# Altium PCB NODE_Module.PcbDoc (part 1 of 3)
Units mil, origin at the board's own origin, x right, y up, seen from the top; angles counter-clockwise.
Board outline 4300 x 3800 mil, 4 copper layers (Top Layer, Int1 (GND), Int2 (GND), Bottom Layer), stack 43.712 mil thick; 95 components, 106 nets, 420 pads, 98 vias.
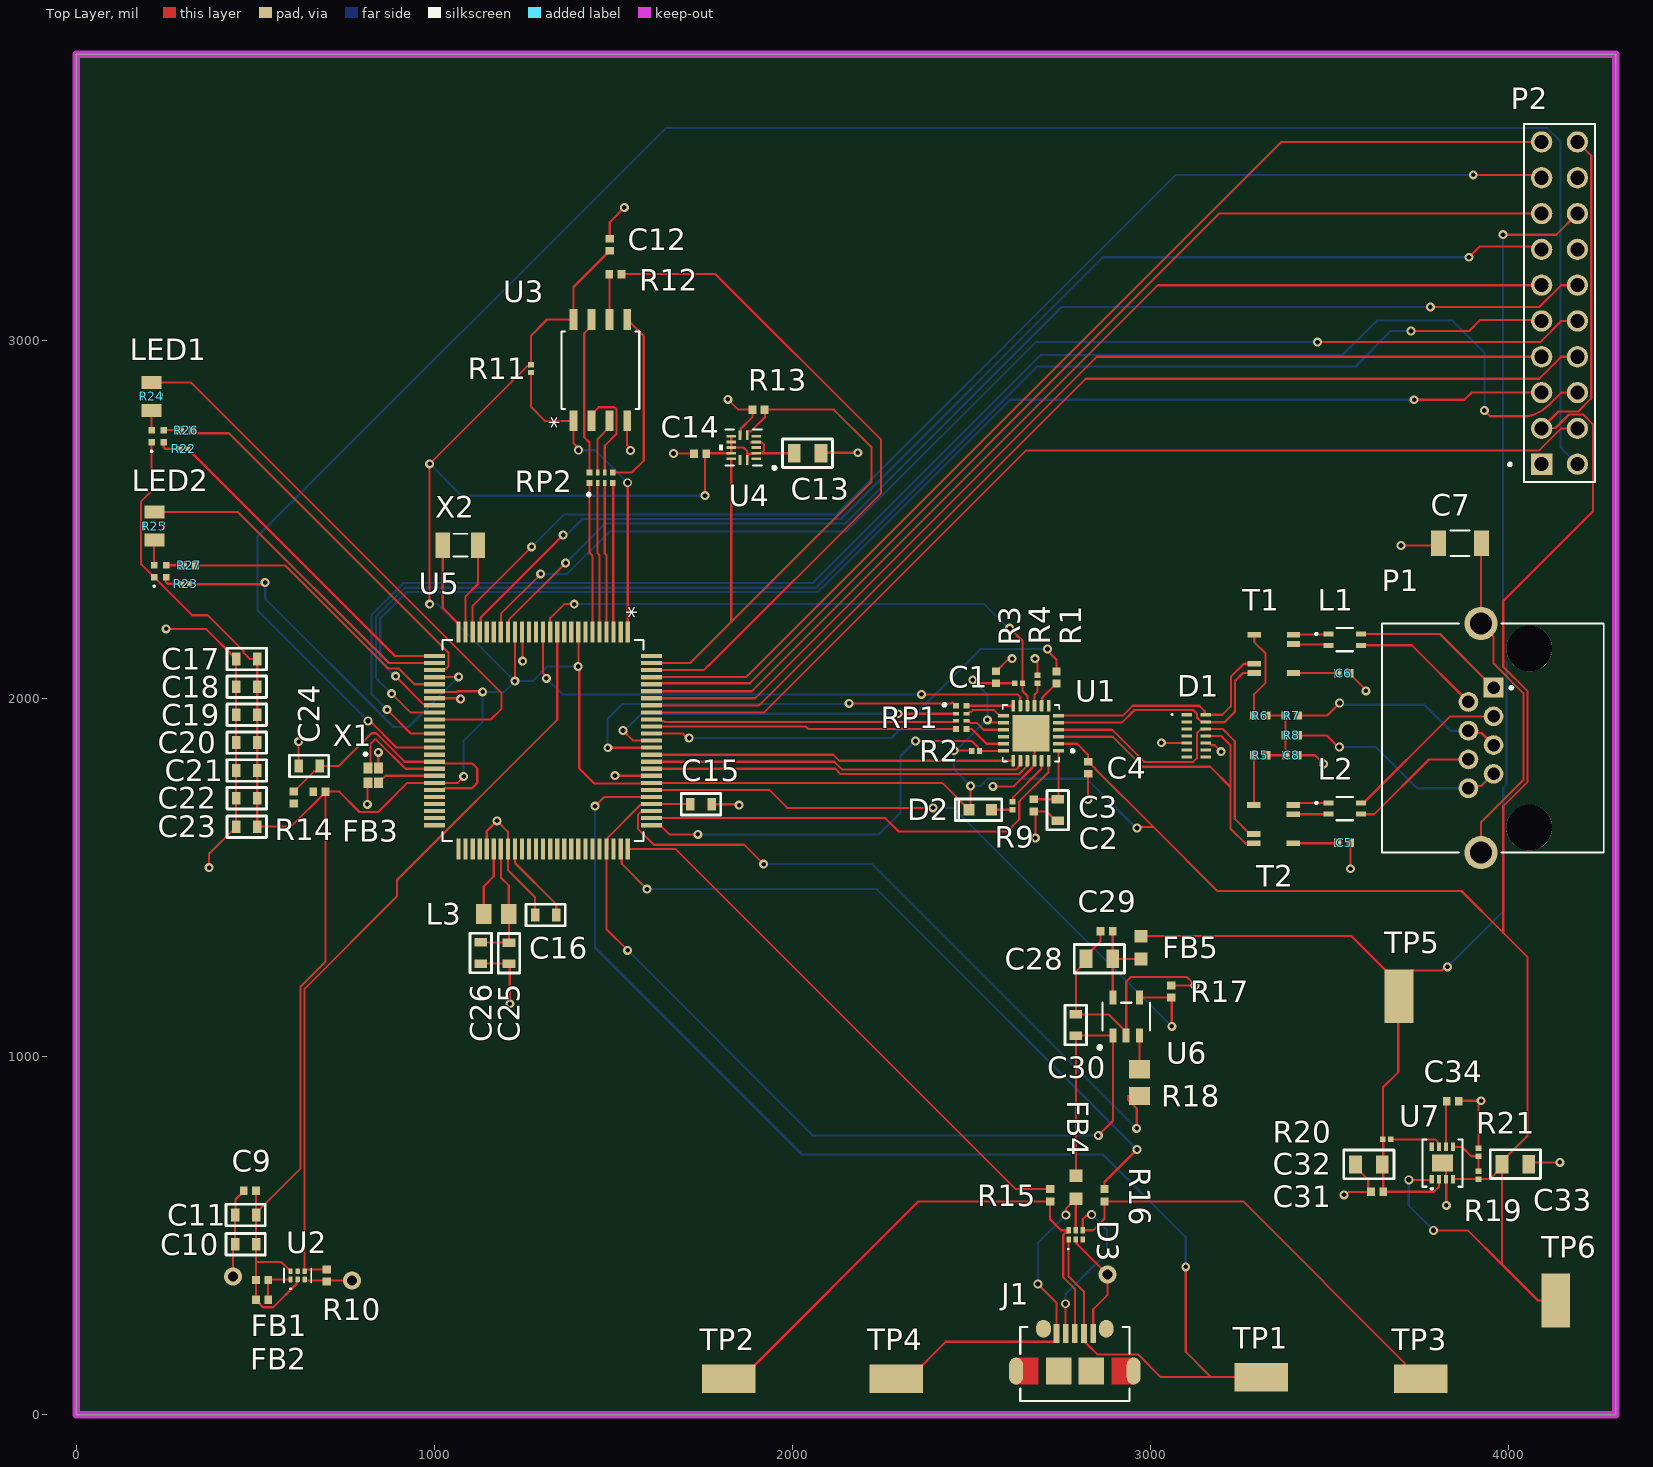
[diagram p0: Top Layer view]
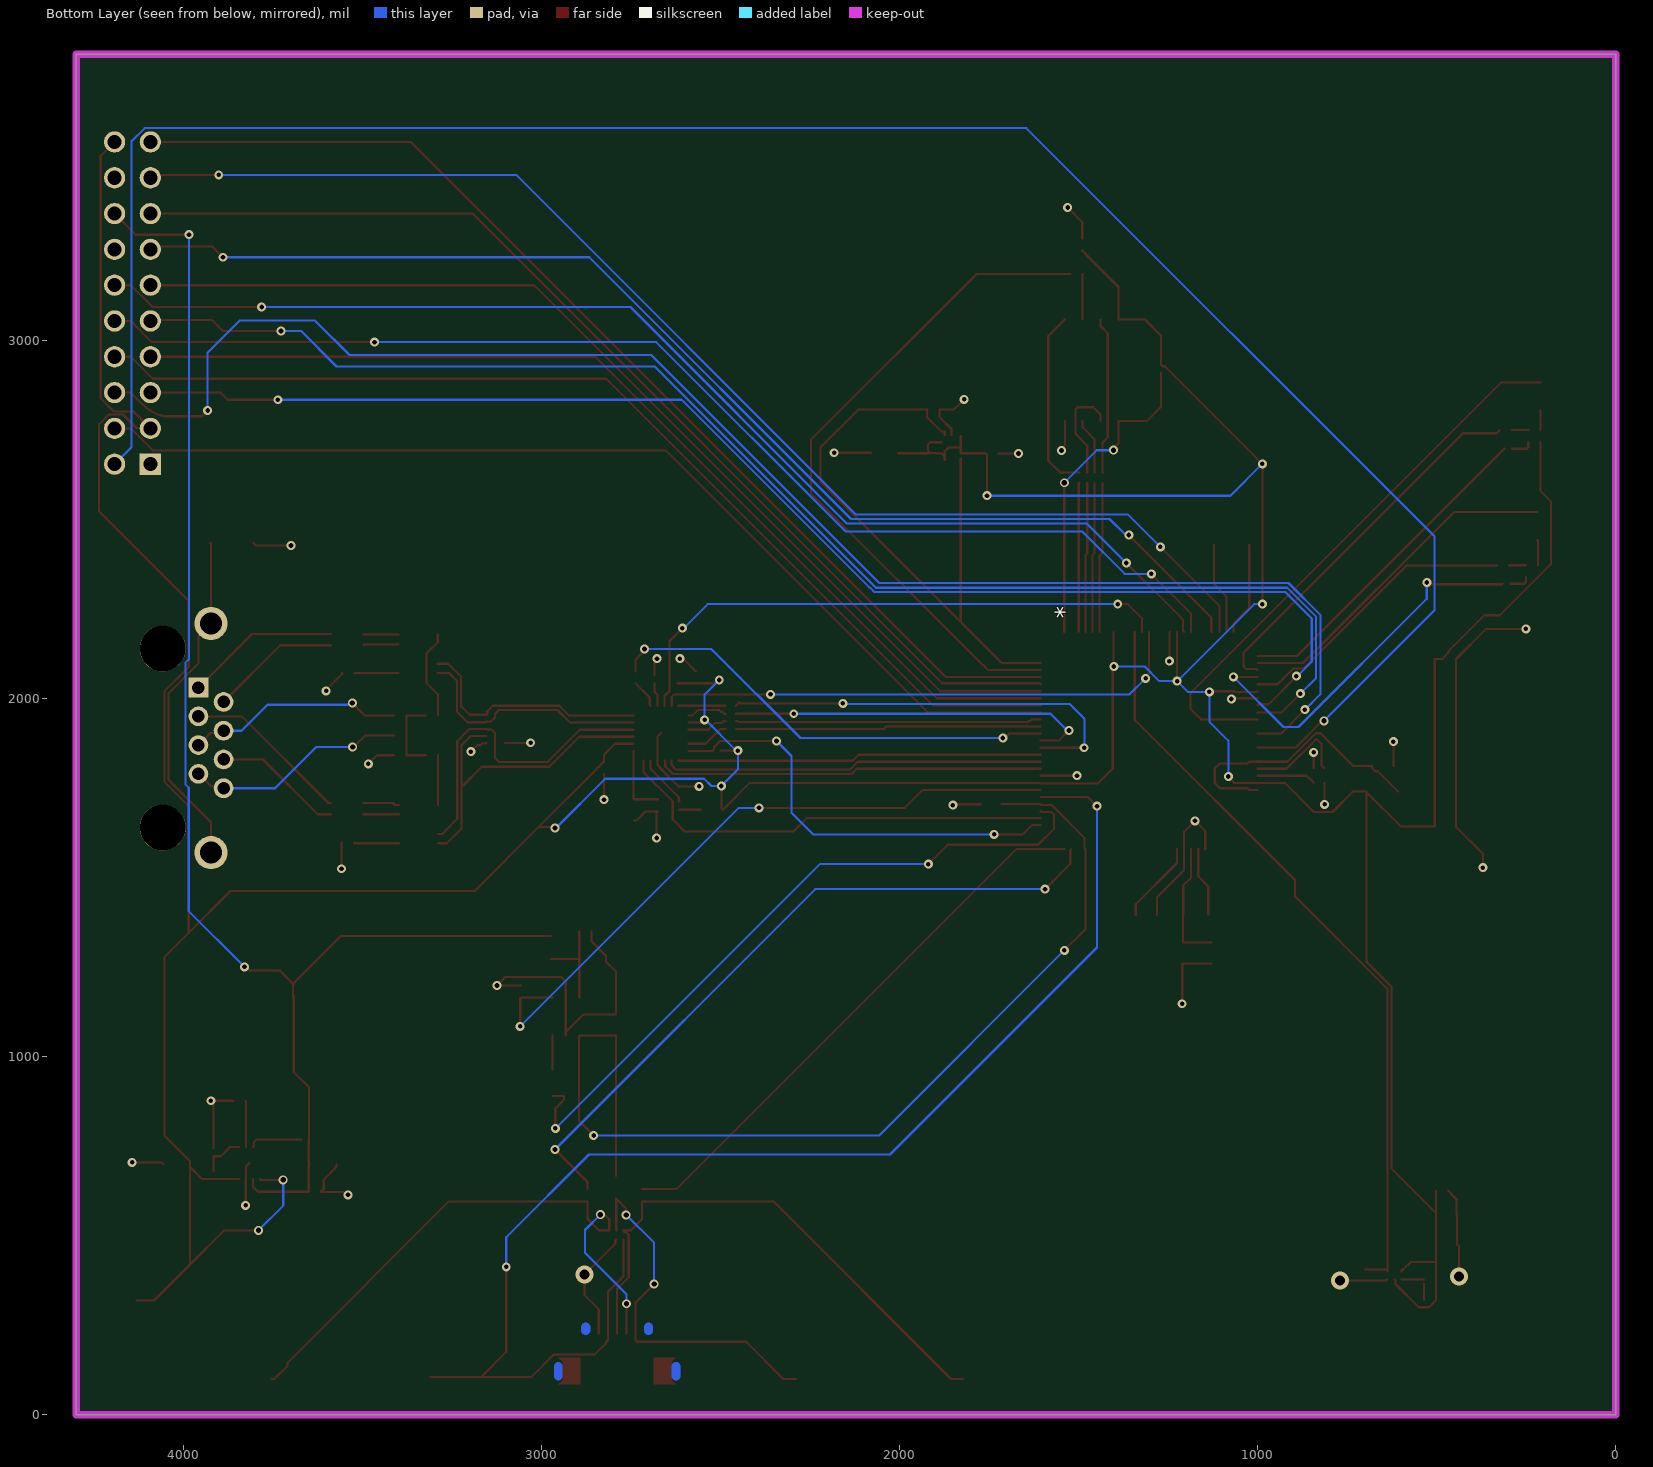
[diagram p1: Bottom Layer view, seen from below]
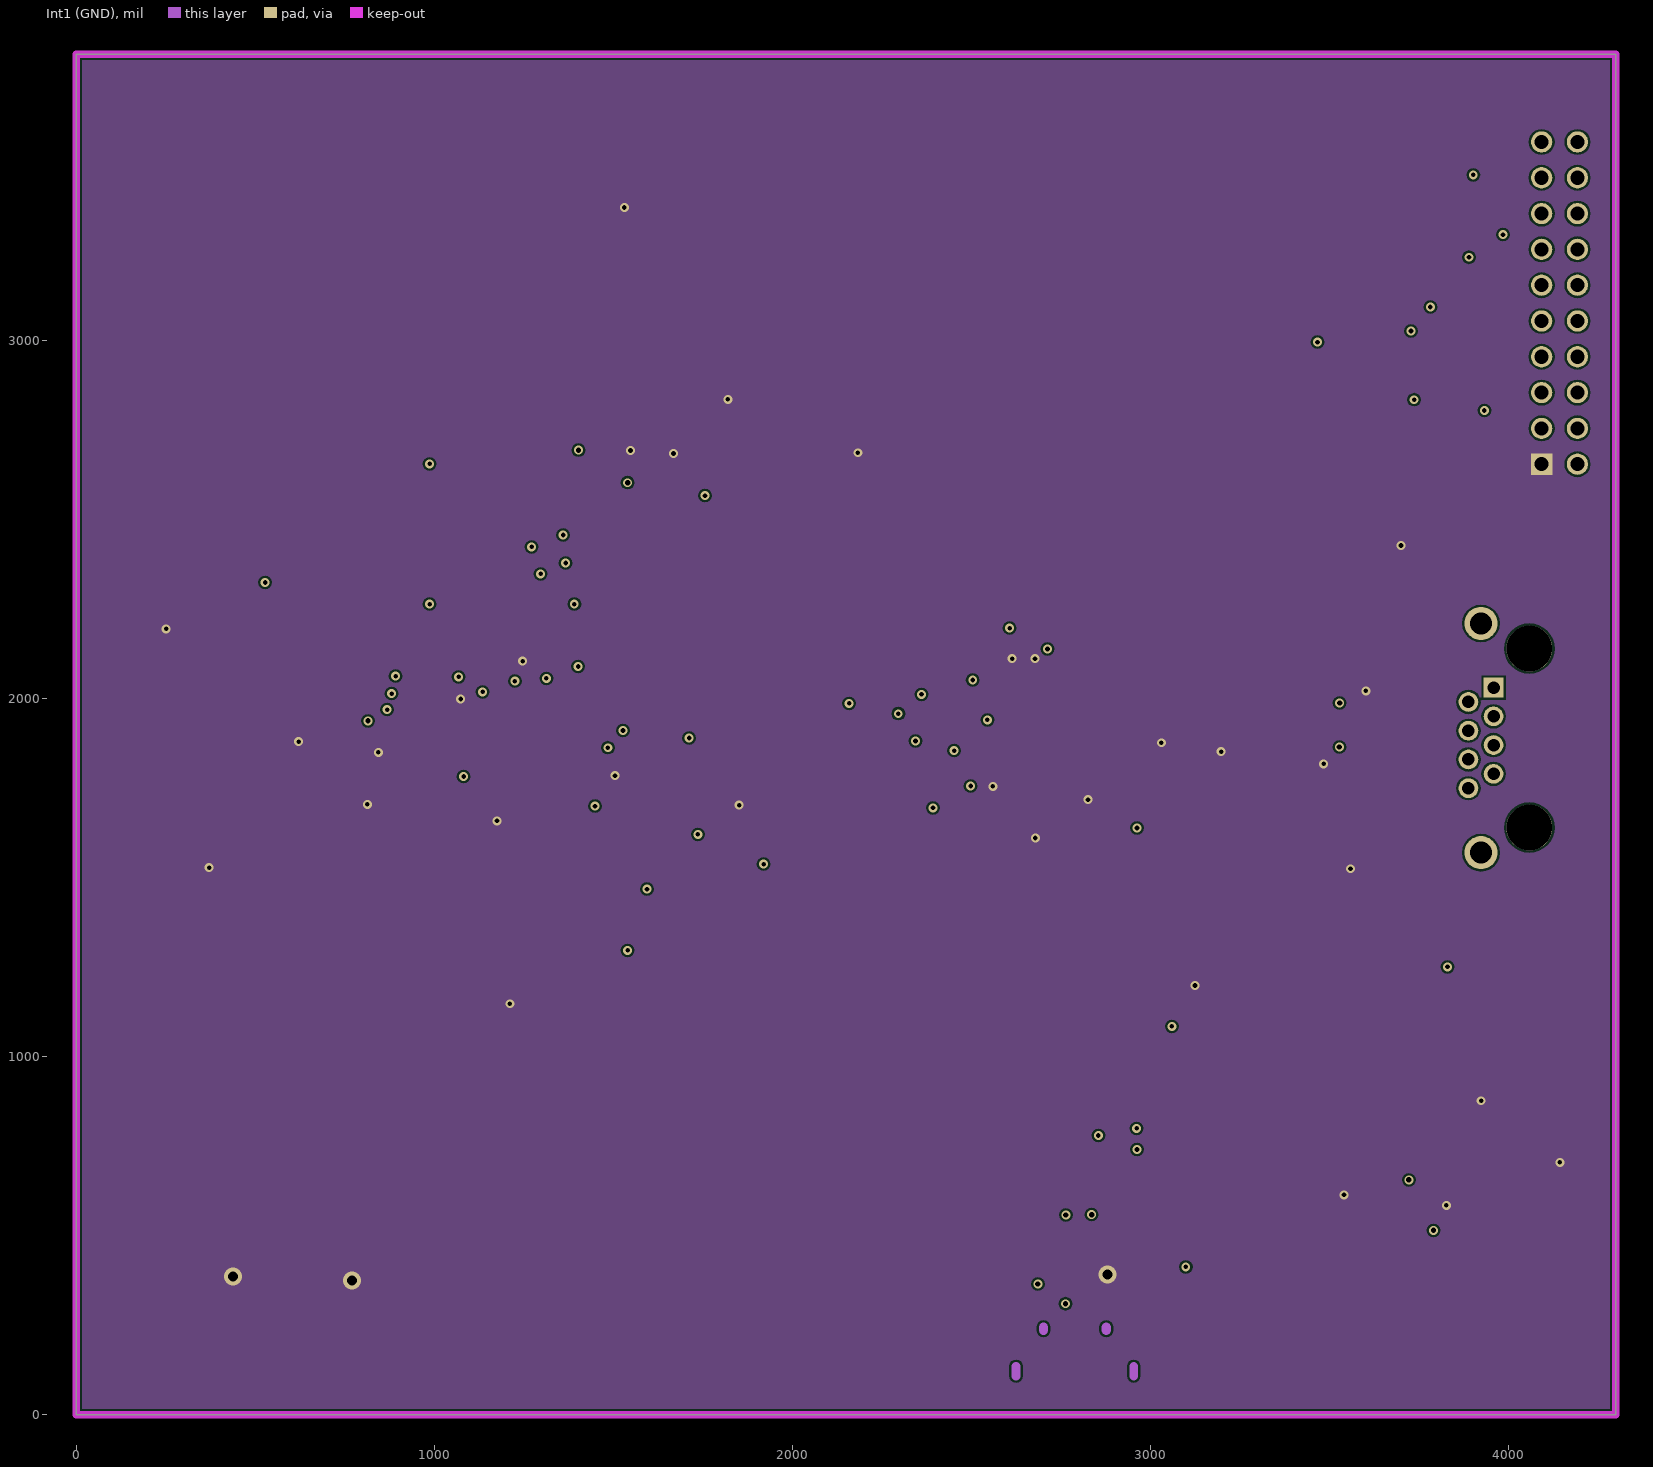
[diagram p2: Int1 (GND)]
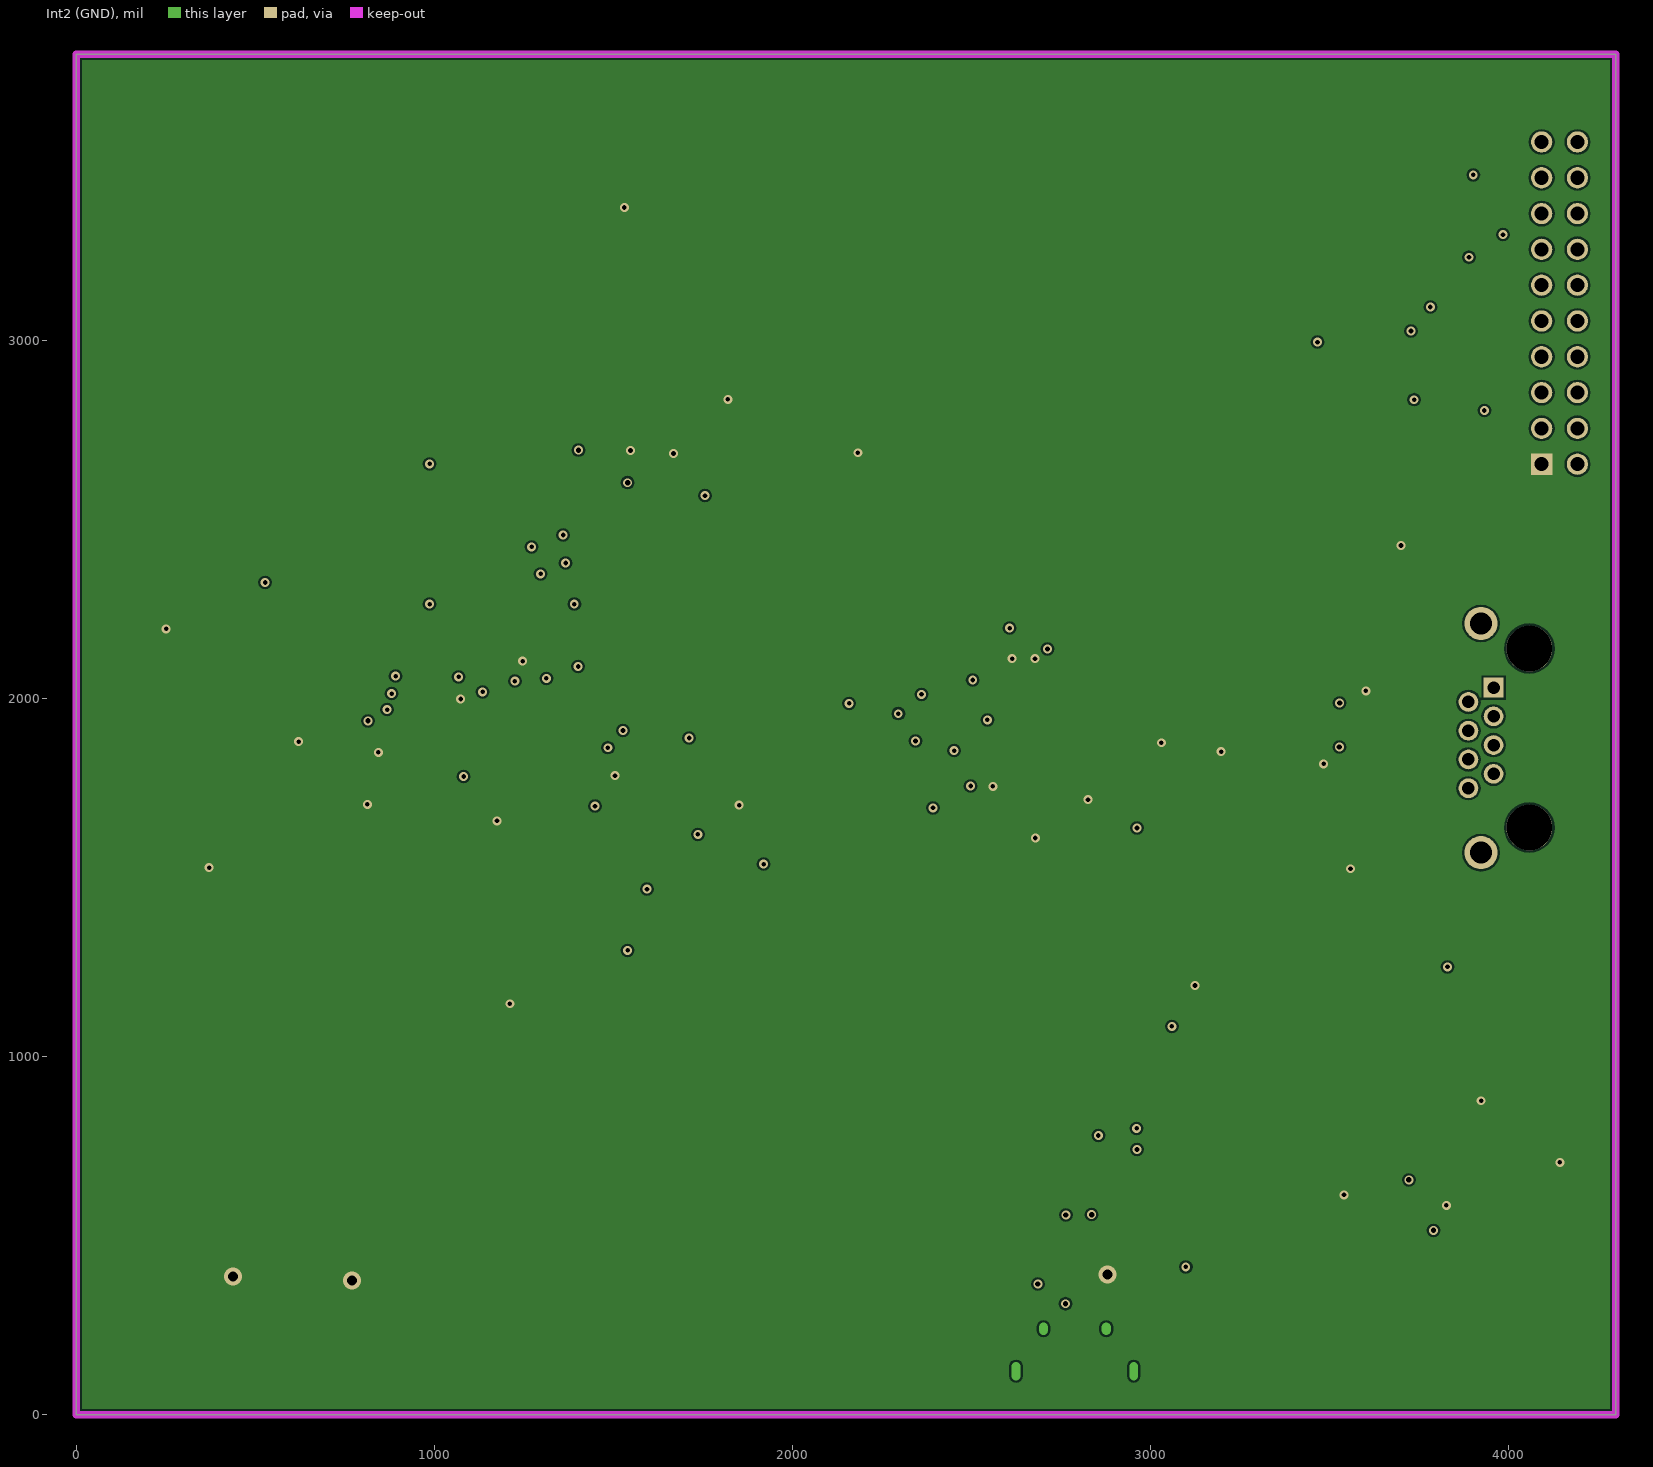
[diagram p3: Int2 (GND)]
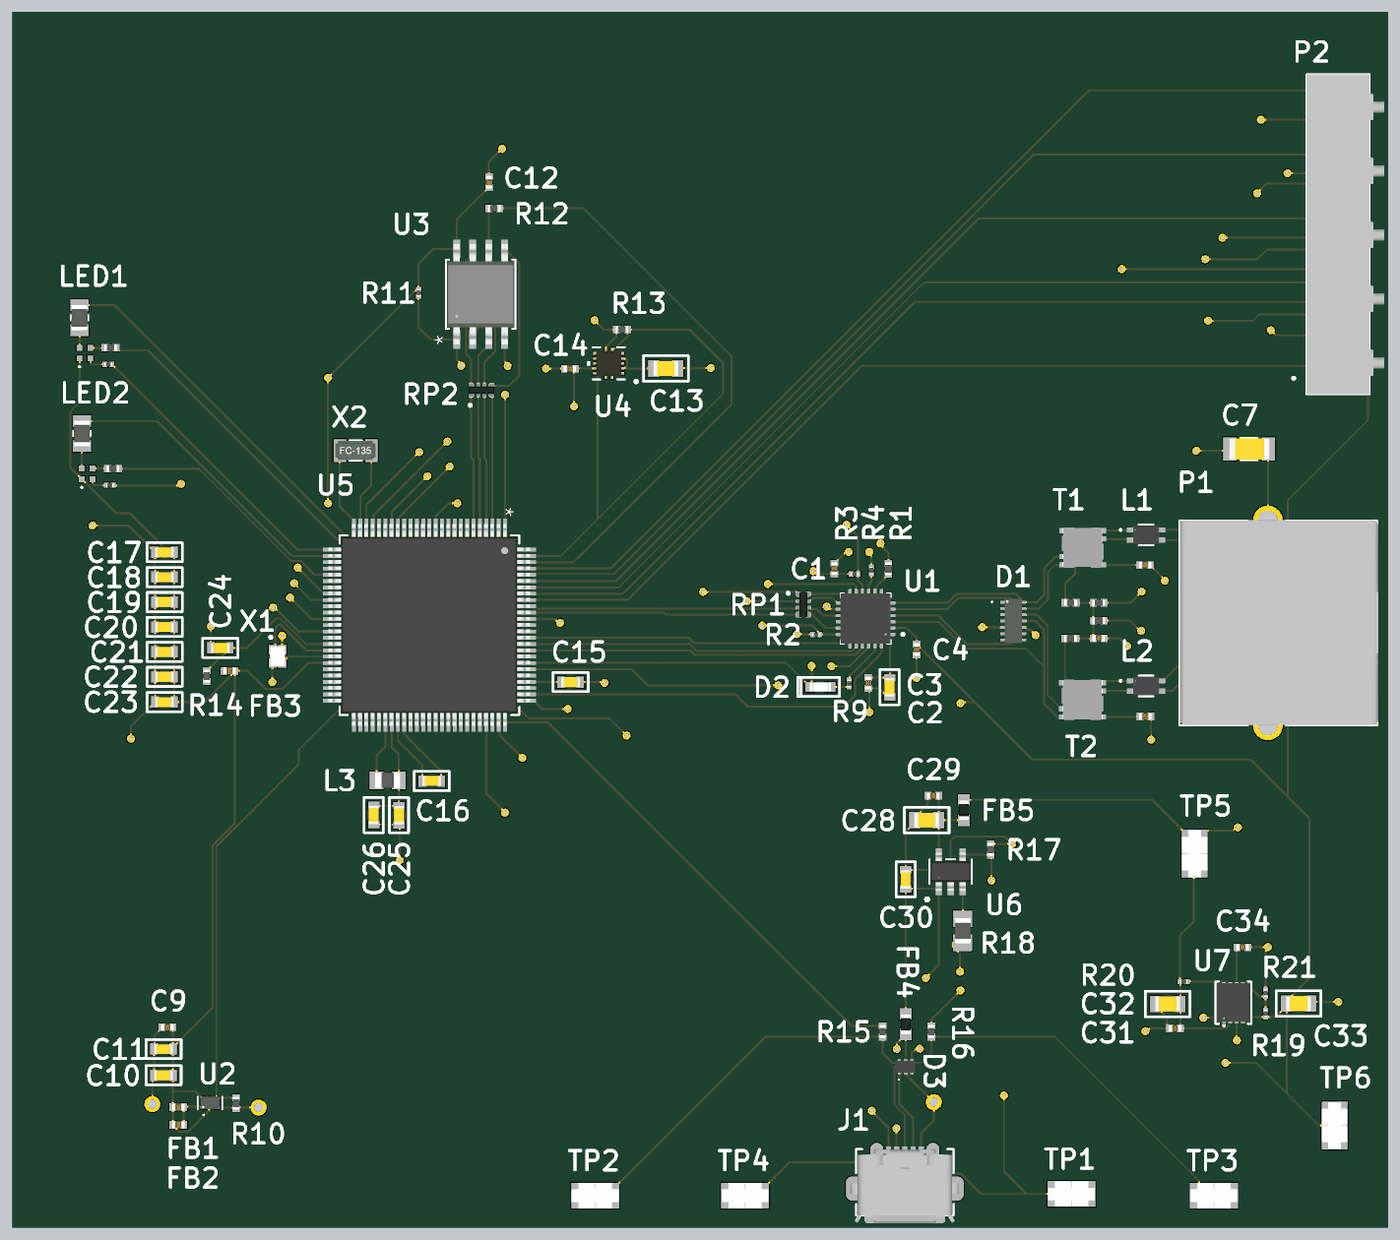
[diagram p5: 3D render of the assembled board from above, using the file's embedded part models]

## Layer stack, top to bottom
Top Solder: solder mask 1, SM-001, Dk 4
Top Layer: signal copper 1.378
Dielectric 2: prepreg 5.1, PP-017, Dk 4.3
Int1 (GND): signal copper 1.378
Dielectric 3: core 28, Core-039, Dk 4.8
Int2 (GND): signal copper 1.378
Dielectric 4: prepreg 5.1, PP-017, Dk 4.3
Bottom Layer: signal copper 1.378
Bottom Solder: solder mask 1, SM-001, Dk 4

## Board outline
0,0 4300,0 4300,3800 0,3800

## Design rules (kind name [scope] priority, off if disabled: settings)
Clearance [All] p1: gap=6 ignorepadtopadclearanceinfootprint=TRUE
HoleSize [All] p1: absolutevalues=TRUE maxlimit=100 minlimit=13 maxpercent=80.000 minpercent=20.000
HoleToHoleClearance [All] p1: gap=6 allowstackedmicrovias=TRUE
MinimumSolderMaskSliver [All] p1: minsoldermaskwidth=6
PlaneClearance [All] p1: clearance=10
PlaneConnect [All] p1: planeconnectstyle=Direct reliefexpansion=20 reliefentries=4 reliefconductorwidth=10 reliefairgap=10
PolygonConnect [All] p1: connectstyle=Direct reliefconductorwidth=10 reliefentries=4 polygonreliefangle="90 Angle" airgapwidth=10
RoutingVias [All] p1: holewidth=13 width=25 viastyle="Through Hole" minholewidth=13 minwidth=25 maxholewidth=60 maxwidth=80
SilkToSilkClearance [All] p1: silktosilkclearance=6
SilkToSolderMaskClearance [IsPad] p1: minsilkscreentomaskgap=6 clearancetoexposedcopper=TRUE
SolderMaskExpansion [All] p1: expansion=4 istentingtop=FALSE
UnRoutedNet [All] p1: checkbadconnections=TRUE
Width "Schematic Width Constraint_1" [InNet('3V3')] p1: maxlimit=100 minlimit=6 preferedwidth=20 midlayer1_minwidth=10 midlayer1_maxwidth=10 midlayer1_prefwidth=10 midlayer2_minwidth=10 midlayer2_maxwidth=10 midlayer2_prefwidth=10 minimp=50.000000 maximp=50.000000 favimp=50.000000
Width [All] p2: maxlimit=100 minlimit=6 preferedwidth=10 toplayer_prefwidth=6 midlayer1_minwidth=10 midlayer1_maxwidth=10 midlayer2_minwidth=10 midlayer2_maxwidth=10 bottomlayer_prefwidth=6 minimp=50.000000 maximp=50.000000 favimp=50.000000
22 further rules are at their usual default settings.

## Classes and differential pairs
component class U_USB: C28 C29 C30 D3 FB4 FB5 J1 R15 R16 R17 R18 TP1 TP2 TP3 TP4 U6
component class U_Quad_SPI_Memory: C12 egp R11 R12 RP2 U3
component class U_Power: C31 C32 C33 C34 R19 R20 R21 TP5 TP6 U7
component class U_LED: LED1 LED2 R22 R23 R24 R25 R26 R27
component class U_External_Memory_Power_Switch: C13 C14 R13 U4
component class U_EXP_Headers: P2
component class U_Ethernet_Switch: C9 C10 C11 FB1 FB2 R10 U2
component class U_Ethernet_PHY: C1 C2 C3 C4 R1 R2 R3 R4 RP1 U1
component class U_Ethernet_Jack: C5 C6 C7 C8 D1 D2 L1 L2 P1 R5 R6 R7 R8 R9 T1 T2
component class U_EFM32_2: C15 C16 C17 C18 C19 C20 C21 C22 C23 C24 C25 C26 FB3 L3 R14 U5 X1 X2

## Components (designator, comment, footprint, x,y, rotation, side; value= is the part's Value field where it differs from the comment)
C1 "0.1uF" C0402 2569,2060 r270 top
C2 "2.2uF" C0603 2741.58,1689 r90 top
C3 "0.1uF" C0402 2675,1702 r90 top
C4 "0.1uF" C0402 2826,1807 r90 top
C5 "0.1uF" C0402 3541.01,1598 r180 top
C6 "0.1uF" C0402 3540,2071 r180 top
C7 "1nF 2KV" RESC1206X70N 3865,2434 r0 top
C8 "1nF" C0402 3395,1842 r180 top
C9 "0.1uF" C0402 484.99,625.99 r0 top
C10 "22uF" C0603 473,476 r0 top
C11 "22uF" C0603 473,558 r0 top
C12 "0.1uF" C0402 1490,3267.99 r270 top
C13 "10 µF, 16 V" C0805 2042.53,2685.38 r180 top
C14 "0.1uF" C0402 1742.53,2684.38 r0 top
C15 "22uF" C0603 1745,1705 r180 top
C16 "4.7uF" C0603 1311,1396 r0 top
C17 "22uF" C0603 476.2,2111.06 r0 top
C18 "22uF" C0603 476.2,2033.17 r0 top
C19 "22uF" C0603 476.2,1955.29 r180 top
C20 "22uF" C0603 476.2,1877.4 r180 top
C21 "22uF" C0603 476.2,1799.52 r180 top
C22 "22uF" C0603 476.2,1721.64 r180 top
C23 "22uF" C0603 476.2,1642.64 r180 top
C24 "4.7uF" C0603 650.47,1812 r0 top
C25 "22uF" C0603 1208.69,1289.11 r270 top
C26 "22uF" C0603 1129.81,1289.64 r270 top
C28 "10 µF, 16 V" C0805 2857.6,1273.42 r180 top
C29 "0.1uF" C0402 2878,1350 r0 top
C30 "1uF" C0603 2792,1088.53 r270 top
C31 "0.1uF" C0402 3633.47,622.48 r0 top
C32 "10 µF, 16 V" C0805 3610.47,699.07 r0 top
C33 "10 µF, 16 V" C0805 4019.47,700 r180 top
C34 "33nF" C0402 3844.47,876 r180 top
D1 "TPD6E05U06RVZR" SON50P135X350X55-14N 3128,1896 r0 top
D2 "Green" LED_0603 2525.07,1690 r0 top
D3 "IP4221CZ6-XS132" SOT886_NEX-M 2791.61,502.39 r90 top
FB1 "1K" FB0402 519,376.29 r0 top
FB2 "1K" FB0402 519,321 r0 top
FB3 "1K" FB0402 679.03,1740.29 r0 top
FB4 "1K 100MHz" FB0603 2792.39,635.44 r90 top
FB5 "1K 100MHz" FB0603 2974,1305 r270 top
J1 "Micro USB AB" "MOLEX MICRO USB" 2789.28,181.06 r0 top
L1 "ACM2012" IND_TDK_ACM2012_2P_TDK-M 3543,2165 r0 top
L2 "ACM2012" IND_TDK_ACM2012_2P_TDK-M 3543,1693 r0 top
L3 "4.7uH" L0805 1173,1398 r0 top
LED1 "SMLP34RGB2W3" ROHM-SMLP34-4_V 227.27,2733.27 r180 top
LED2 "SMLP34RGB2W3" ROHM-SMLP34-4_V 234.27,2356.11 r180 top
P1 "RJ-45" TE_1-406541-5 3973.61,1890.08 r90 top
P2 "2x10 Header" "2X10 HEADER" 4143,3105 r90 top
R1 "49.9R" "R0402 VISHAY" 2738,2059.13 r270 top
R2 "1K" "R0603 VISHAY" 2511.98,1854 r0 top
R3 "1K" "R0603 VISHAY" 2632.02,2043 r180 top
R4 "6.49K" "R0603 VISHAY" 2685,2054 r270 top
R5 "75R" "R0402 VISHAY" 3306.87,1842 r180 top
R6 "75R" "R0402 VISHAY" 3307.13,1953 r180 top
R7 "75R" "R0402 VISHAY" 3395.13,1953 r0 top
R8 "75R" "R0402 VISHAY" 3395.13,1897.29 r0 top
R9 "1K" "R0603 VISHAY" 2615,1701.02 r270 top
R10 "10M" "R0402 VISHAY" 700,389 r90 top
R11 "330K" "R0603 VISHAY" 1270,2922 r90 top
R12 "22R" "R0402 VISHAY" 1506,3186 r0 top
R13 "10M" "R0402 VISHAY" 1905.53,2807.38 r0 top
R14 "1R" "R0402 VISHAY" 608,1724 r270 top
R15 "15R" "R0402 VISHAY" 2720,613 r90 top
R16 "15R" "R0402 VISHAY" 2872,613 r90 top
R17 "10M" "R0402 VISHAY" 3058,1182 r90 top
R18 "0R" "R0805 YAGEO" 2970,927.6 r270 top
R19 "180K" "R0603 VISHAY" 3916.47,669.02 r270 top
R20 "10K" "R0603 VISHAY" 3660.45,769 r0 top
R21 "110K" "R0603 VISHAY" 3916.47,733 r270 top
R22 "698R" "R0603 VISHAY" 300.29,2698.27 r180 top
R23 "698R" "R0603 VISHAY" 305.27,2321.11 r180 top
R24 "2.32K" "R0805 VISHAY" 210.27,2844.27 r270 top
R25 "2.32K" "R0805 VISHAY" 218.27,2482.11 r270 top
R26 "910R" "R0402 VISHAY" 307.27,2750.27 r180 top
R27 "910R" "R0402 VISHAY" 315.27,2372.11 r180 top
RP1 "49.9R" RESCAXS50P200X100X55-8N 2472,1948 r0 top
RP2 "22RP" RESCAXS50P200X100X55-8N 1466.16,2617.17 r90 top
T1 "ALT3232M-151-T001" ALT3232M-151-T001 3345.06,2126.03 r0 top
T2 "ALT3232M-151-T001" ALT3232M-151-T001 3344.06,1650.32 r0 top
TP1 "5019" TP380X203 3310,105 r180 top
TP2 "5019" TP380X203 1822,100 r180 top
TP3 "5019" TP380X203 3755,100 r0 top
TP4 "5019" TP380X203 2290,100 r0 top
TP5 "5019" TP380X203 3694.47,1169 r90 top
TP6 "5019" TP380X203 4132,319 r90 top
U1 "KSZ8091RNDCA-TR" QFN50P400X400X90-25N 2666.7,1903.49 r180 top
U2 "NX3L1G66" PSON50P145X100X50-6N 618.28,389.42 r90 top
U3 "SST26VF064B-104I/SM" SST26VF064B-104V/SM 1464,2917.5 r90 top
U4 "TS3A4751RUCR" TS3A4751RUCR 1864.16,2701.5 r180 top
U5 "EFM32GG11B420F2048GQ100-B" TQFP100-14X14-0p 1304,1883 r270 top
U6 "AP2151WG-7" AP2151FMG-7 2932.69,1112.4 r90 top
U7 "LP3982ILD-ADJ/NOPB Voltage Regulator" LP3982ILD-ADJ 3816,703 r90 top
X1 "50.0 MHz" XTAL_ECS-500-8-47B-CWY-TR 829.24,1785.67 r270 top
X2 "32.768 KHz" XTAL_FC-135_32.7680KA-A0 1073,2429 r0 top

## Footprints (in the part's own frame and the unit in brackets; to place one, negate y for a bottom-side part, rotate by r counter-clockwise, add the part's x,y. Pads: shape width x height; smd on the part's side, far side on the other; paste and mask are expansions set on the pad)
"2X10 HEADER" [mm] "HE2P-20G6C394-5R (2.54 mm pegs)"
  rect 1.508x1.508 hole 1: 1(-11.43,1.27)
  round 1.508 hole 1: 2(-8.89,1.27) 3(-6.35,1.27) 4(-3.81,1.27) 5(-1.27,1.27) 6(1.27,1.27) 7(3.81,1.27) 8(6.35,1.27) 9(8.89,1.27) 10(11.43,1.27) 11(-11.43,-1.27) 12(-8.89,-1.27) 13(-6.35,-1.27) 14(-3.81,-1.27) 15(-1.27,-1.27) 16(1.27,-1.27) 17(3.81,-1.27) 18(6.35,-1.27) 19(8.89,-1.27) 20(11.43,-1.27)
  silkscreen extent -12.7,-2.52 12.7,3.62, body extent -12.7,-3.65 12.7,2.5, height 9.51
ALT3232M-151-T001 [mil]
  rect 37x16 smd paste+0 mask+0: 1(-54.94,-54.13) 2(-54.94,-28.54) 3(-54.94,52.56) 4(54.94,52.56) 5(54.94,26.97) 6(54.94,-54.13)
  body extent -65,-63 65,63, height 111
AP2151FMG-7 [mm]
  rect 1.006x0.5 smd paste+0 mask+0: 1(-1.353,0.95) 2(-1.353,0) 3(-1.353,-0.95) 4(1.353,-0.95) 5(1.353,0.95)
  silkscreen extent -2.31,-1.68 0.98,1.99, body extent -1.5,-1.55 1.5,1.55, height 1.45
C0402 [mm]
  rect 0.54x0.6 smd mask+0.051: 1(-0.432,0) 2(0.432,0)
  body extent -0.5,-0.25 0.5,0.25, height 0.55
C0603 [mm]
  rect 0.6x0.9 smd: 1(-0.75,0) 2(0.75,0)
  silkscreen extent -1.4,-0.76 1.4,0.76, body extent -0.75,-0.4 0.75,0.4, height 0.66
C0805 [mm]
  rect 0.9x1.3 smd: 1(-0.95,0) 2(0.95,0)
  silkscreen extent -1.78,-1.02 1.78,1.02, body extent -1,-0.6 1,0.6, height 0.95
FB0402 [mm]
  rect 0.54x0.6 smd: 1(-0.432,0) 2(0.432,0)
  body extent -0.5,-0.28 0.5,0.27, height 0.51
FB0603 [mm]
  rect 0.89x0.93 smd: 1(-0.814,0) 2(0.814,0)
  body extent -0.8,-0.4 0.8,0.4, height 0.51
IND_TDK_ACM2012_2P_TDK-M [mil]
  rect 28x14 smd paste+1 mask+0: 1(-45.5,15.75) 2(-45.5,-15.75) 3(45.5,-15.75) 4(45.5,15.75)
  silkscreen extent -82,-32 23,32, body extent -43,-27 44,27, height 51
L0805 [mm]
  rect 1.1x1.42 smd: 1(-0.885,0) 2(0.885,0)
  body extent -1,-0.63 1,0.63, height 1
LED_0603 [mm]
  rect 0.8x0.8 smd: 1(-0.8,0) 2(0.8,0)
  silkscreen extent -1.78,-0.76 1.52,0.76, body extent -0.85,-0.4 0.85,0.4, height 0.67
LP3982ILD-ADJ [mil] "300 mA voltage regulator"
  rect 24x12 smd paste-6: 1(-45,29.53) 2(-45,9.84) 3(-45,-9.84) 4(-45,-29.53) 5(45,-29.53) 6(45,-9.84) 7(45,9.84) 8(45,29.53)
  rect 47.24x59.06 smd paste-29.03 mask+0: 9(0,0)
  silkscreen extent -74,-56 66,56, body extent -63,-51 63,51, height 24
"MOLEX MICRO USB" [mil]
  rect 16x53 smd paste+0 mask+0: 1(-51.18,46.18) 2(-25.59,46.18) 3(0,46.18) 4(25.59,46.18) 5(51.18,46.18)
  oval 41x49 smd: 6(-87.6,59.06) 7(87.6,59.06)
  oval 39x75 smd: 8(-164.37,-59.06) 9(164.37,-59.06)
  rect 71x75 smd: 10(-45.28,-59.06) 11(45.28,-59.06)
  Top Layer region: 164.37,-21.56 102.37,-21.56 102.37,-96.56 164.37,-96.56 152.37,-84.56 152.37,-33.56
  Top Layer region: -102.37,-96.56 -102.37,-21.56 -164.37,-21.56 -152.37,-33.56 -152.37,-84.56 -164.37,-96.56
  Multi-Layer lines w24: -164.37,-72.83 -164.37,-45.28 ; 164.37,-72.83 164.37,-45.28
  Multi-Layer lines w26: -87.6,55.12 -87.6,62.99 ; 87.6,55.12 87.6,62.99
  silkscreen extent -152,-143 153,64, body extent -171,-167 170,65, height 108
PSON50P145X100X50-6N [mm]
  rrect50% 0.42x0.31 smd: 1(-0.29,0.5) 2(-0.29,0) 3(-0.29,-0.5) 4(0.29,-0.5) 5(0.29,0) 6(0.29,0.5)
  silkscreen extent -1,-0.97 0.5,0.97, body extent -0.5,-0.73 0.5,0.72, height 0.5
QFN50P400X400X90-25N [mm]
  rrect25% 0.81x0.26 smd mask+0.025: 1(-1.95,1.25) 2(-1.95,0.75) 3(-1.95,0.25) 4(-1.95,-0.25) 5(-1.95,-0.75) 6(-1.95,-1.25) 13(1.95,-1.25) 14(1.95,-0.75) 15(1.95,-0.25) 16(1.95,0.25) 17(1.95,0.75) 18(1.95,1.25)
  rrect25% 0.26x0.81 smd mask+0.025: 7(-1.25,-1.95) 8(-0.75,-1.95) 9(-0.25,-1.95) 10(0.25,-1.95) 11(0.75,-1.95) 12(1.25,-1.95) 19(1.25,1.95) 20(0.75,1.95) 21(0.25,1.95) 22(-0.25,1.95) 23(-0.75,1.95) 24(-1.25,1.95)
  rect 2.6x2.6 smd mask+0.025: 25(0,0)
  silkscreen extent -3.06,-2 2,2, body extent -1.99,-1.99 1.99,1.99, height 0.89
"R0402 VISHAY" [mm]
  rect 0.56x0.6 smd mask+0.051: 1(-0.435,0) 2(0.435,0)
  body extent -0.5,-0.25 0.5,0.25, height 0.35
"R0603 VISHAY" [mm]
  rect 0.38x0.4 smd: 1(-0.28,0) 2(0.28,0)
  body extent -0.3,-0.15 0.3,0.15, height 0.29
"R0805 VISHAY" [mm]
  rect 0.92x1.42 smd: 1(-1,0) 2(1,0)
  silkscreen extent -0.22,-0.7 0.22,0.7, body extent -1,-0.63 1,0.63, height 0.5
"R0805 YAGEO" [mm]
  rect 1.3x1.5 smd: 1(-0.95,0) 2(0.95,0)
  body extent -1,-0.62 1,0.63, height 0.61
RESC1206X70N [mm]
  rect 1.06x1.82 smd: 1(-1.528,0) 2(1.528,0)
  silkscreen extent -0.68,-0.9 0.68,0.9, body extent -1.57,-0.84 1.63,0.84, height 1.51
RESCAXS50P200X100X55-8N [mm]
  rect 0.435x0.41 smd mask+0.025: 1(-0.377,0.825) 4(-0.377,-0.825) 5(0.377,-0.825) 8(0.377,0.825)
  rect 0.435x0.26 smd mask+0.025: 2(-0.377,0.25) 3(-0.377,-0.25) 6(0.377,-0.25) 7(0.377,0.25)
  silkscreen extent -1.29,0.79 -1.09,0.99, body extent -0.49,-1 0.51,1, height 0.37
ROHM-SMLP34-4_V [mm] "SMD, 4-Leads, Body 1x1mm, Pitch 0.85mm"
  rect 0.45x0.45 smd: 1(0.425,0.425) 2(0.425,-0.425) 3(-0.425,-0.425) 4(-0.425,0.425)
  silkscreen extent 0.36,1.01 0.49,1.14, body extent -0.5,-0.5 0.5,0.5, height 0.25
SON50P135X350X55-14N [mm]
  rrect6% 0.74x0.22 smd paste+0 mask+0.025: 1(-0.67,1.5)
  rrect6% 0.74x0.22 smd mask+0.025: 2(-0.67,1) 3(-0.67,0.5) 4(-0.67,0) 5(-0.67,-0.5) 6(-0.67,-1) 7(-0.67,-1.5) 8(0.67,-1.5) 9(0.67,-1) 10(0.67,-0.5) 11(0.67,0) 12(0.67,0.5) 13(0.67,1) 14(0.67,1.5)
  silkscreen extent -1.75,1.47 -1.65,1.57, body extent -0.67,-1.75 0.68,1.75, height 0.56
SOT886_NEX-M [mil]
  rect 18x12 smd paste+0 mask+1: 1(-13,19.71) 2(-13,0.01) 4(13,-19.68) 5(13,0) 6(13,19.68)
  rect 18x12 smd mask+1: 3(-13,-19.68)
  silkscreen extent -40,20 -39,22, body extent -23,-29 23,29, height 10
SST26VF064B-104V/SM [mil]
  rect 58x22 smd paste+0 mask+0: 1(-141.5,75) 2(-141.5,25) 3(-141.5,-25) 4(-141.5,-75) 5(141.5,-75) 6(141.5,-25) 7(141.5,25) 8(141.5,75)
  silkscreen extent -108,-108 108,108, body extent -156,-103 157,104, height 80
TE_1-406541-5 [mm]
  rect 1.398x1.398 hole 0.89: 1(3.58,0.38)
  round 1.398 hole 0.89: 2(2.56,2.16) 3(1.54,0.38) 4(0.52,2.16) 5(-0.5,0.38) 6(-1.52,2.16) 7(-2.54,0.38) 8(-3.56,2.16)
  round 2.355 hole 1.57: S1(8.13,1.27) S2(-8.13,1.27)
  round 3.25 hole 3.25 unplated: ""(-6.35,-2.16) ""(6.35,-2.16)
  silkscreen extent -8.13,-7.44 8.13,8.3, body extent -8.1,-7.49 8.17,8.25, height 13.48
TP380X203 [mm]
  rect 3.8x2.03 smd: 1(0,0)
  body extent -1.9,-1.01 1.91,1.02, height 2.3
TQFP100-14X14-0p [mm]
  rect 1.5x0.3 smd paste+0 mask+0: 1(-7.7,6) 2(-7.7,5.5) 3(-7.7,5) 4(-7.7,4.5) 5(-7.7,4) 6(-7.7,3.5) 7(-7.7,3) 8(-7.7,2.5) 9(-7.7,2) 10(-7.7,1.5) 11(-7.7,1) 12(-7.7,0.5) 13(-7.7,0) 14(-7.7,-0.5) 15(-7.7,-1) 16(-7.7,-1.5) 17(-7.7,-2) 18(-7.7,-2.5) 19(-7.7,-3) 20(-7.7,-3.5) 21(-7.7,-4) 22(-7.7,-4.5) 23(-7.7,-5) 24(-7.7,-5.5) 25(-7.7,-6) 51(7.7,-6) 52(7.7,-5.5) 53(7.7,-5) 54(7.7,-4.5) 55(7.7,-4) 56(7.7,-3.5) 57(7.7,-3) 58(7.7,-2.5) 59(7.7,-2) 60(7.7,-1.5) 61(7.7,-1) 62(7.7,-0.5) 63(7.7,0) 64(7.7,0.5) 65(7.7,1) 66(7.7,1.5) 67(7.7,2) 68(7.7,2.5) 69(7.7,3) 70(7.7,3.5) 71(7.7,4) 72(7.7,4.5) 73(7.7,5) 74(7.7,5.5) 75(7.7,6)
  rect 0.3x1.5 smd paste+0 mask+0: 26(-6,-7.7) 27(-5.5,-7.7) 28(-5,-7.7) 29(-4.5,-7.7) 30(-4,-7.7) 31(-3.5,-7.7) 32(-3,-7.7) 33(-2.5,-7.7) 34(-2,-7.7) 35(-1.5,-7.7) 36(-1,-7.7) 37(-0.5,-7.7) 38(0,-7.7) 39(0.5,-7.7) 40(1,-7.7) 41(1.5,-7.7) 42(2,-7.7) 43(2.5,-7.7) 44(3,-7.7) 45(3.5,-7.7) 46(4,-7.7) 47(4.5,-7.7) 48(5,-7.7) 49(5.5,-7.7) 50(6,-7.7) 76(6,7.7) 77(5.5,7.7) 78(5,7.7) 79(4.5,7.7) 80(4,7.7) 81(3.5,7.7) 82(3,7.7) 83(2.5,7.7) 84(2,7.7) 85(1.5,7.7) 86(1,7.7) 87(0.5,7.7) 88(0,7.7) 89(-0.5,7.7) 90(-1,7.7) 91(-1.5,7.7) 92(-2,7.7) 93(-2.5,7.7) 94(-3,7.7) 95(-3.5,7.7) 96(-4,7.7) 97(-4.5,7.7) 98(-5,7.7) 99(-5.5,7.7) 100(-6,7.7)
  silkscreen extent -7.13,-7.13 7.13,7.13, body extent -8.03,-8.03 7.98,7.98, height 1.2
TS3A4751RUCR [mm] "Texas Instruments IC Quad Switch"
  rect 0.68x0.2 smd paste-0.1: 1(-0.885,0.8) 2(-0.885,0.4) 3(-0.885,0) 4(-0.885,-0.4) 5(-0.885,-0.8) 8(0.885,-0.8) 9(0.885,-0.4) 10(0.885,0) 11(0.885,0.4) 12(0.885,0.8)
  rect 0.2x0.68 smd paste-0.1: 6(-0.25,-0.885) 7(0.25,-0.885) 13(0.25,0.885) 14(-0.25,0.885)
  silkscreen extent -2.27,-1.28 1.73,1.53, body extent -1,-1 1,1, height 0.4
XTAL_ECS-500-8-47B-CWY-TR [mm]
  rect 0.75x0.65 smd: 1(-0.525,-0.375) 2(0.525,-0.375) 3(0.525,0.375) 4(-0.525,0.375)
  silkscreen extent -1.61,-0.64 -1.42,-0.44, body extent -0.8,-0.6 0.8,0.6, height 0.35
XTAL_FC-135_32.7680KA-A0 [mm]
  rect 1x1.8 smd: 1(-1.25,0) 2(1.25,0)
  silkscreen extent -0.5,-0.8 0.5,0.8, body extent -1.6,-0.75 1.6,0.75, height 0.8

## Part data
C1 C3 C4 C5 C6 C9 C12 C14 C29 C31: library part GRM022R60J104KE15L, "CAP CER 0.1UF 6.3V X5R 01005", Capacitance=100nF, Case Code (Imperial)=1005, Case Code (Metric)=0402, Manufacturer=Murata, Max Operating Temperature=85°C, Min Operating Temperature=-55°C, Supplier Part Number 1=490-16598-1-ND, Tolerance=10%, Voltage Rating=6.3V, Category="Ceramic Capacitors", ComponentLink1Description=http://search.murata.co.jp/Ceramy/image/img/A01X/G101/ENG/GRM022R60J104KE15-01.pdf?src-supplier=Digi-Key, ComponentLink1URL=http://search.murata.co.jp/Ceramy/image/img/A01X/G101/ENG/GRM022R60J104KE15-01.pdf?src-supplier=Digi-Key, Manufacturer Part Number=GRM022R60J104KE15L, Mount="Surface Mount", Packaging="Cut Tape", Pricing 1="1=0.13000, 10=0.09000, 50=0.05080, 100=0.04210, 500=0.02952, 1000=0.02444, 2500=0.02275, 5000=0.02081 (USD)", RoHS=No, Stock 1=633064, Supplier 1=Digi-Key
C2: library part LMK107BJ225KK-T, "Cap Ceramic 2.2uF 10V X5R 10% Pad SMD 0603 85C T/R", Manufacturer="Taiyo Yuden", Supplier Part Number 1=587-6290-1-ND, Category="Ceramic Capacitors", ComponentLink1Description=http://www.farnell.com/datasheets/2801359.pdf?src-supplier=Newark, ComponentLink1URL=http://www.farnell.com/datasheets/2801359.pdf?src-supplier=Newark, Manufacturer Part Number=LMK107BJ225KK-T, Pricing 1="1=0.17000, 10=0.11900, 50=0.06760, 100=0.05600, 500=0.03926, 1000=0.03250 (USD)", RoHS=No, Stock 1=4228, Supplier 1=Digi-Key
C7: library part 1206GC102KAT3A, "1206 1000 pF 2000 V ±10 % Tolerance X7R SMT Multilayer Ceramic Capacitor", Capacitance=1nF, Case Code (Imperial)=1206, Case Code (Metric)=3216, Dielectric=X7R, Manufacturer="Kyocera AVX", Max Operating Temperature=125°C, Min Operating Temperature=-55°C, Package Quantity=10000, Supplier Part Number 1=581-1206GC102KAT3A, Tolerance=10%, Voltage Rating=2kV, Case/Package=1206, Category="Ceramic Capacitors", ComponentLink1Description=https://datasheet.ciiva.com/13205/aphvc-13205007.pdf?src-supplier=Mouser, ComponentLink1URL=https://datasheet.ciiva.com/13205/aphvc-13205007.pdf?src-supplier=Mouser, Depth=1.6mm, Length=3.2mm, Manufacturer Part Number=1206GC102KAT3A, Mount="Surface Mount", Packaging="Tape and Reel", Pricing 1="1=0.37000, 10=0.27700, 100=0.16600, 500=0.12500, 1000=0.10800, 2500=0.08900 (USD)", RoHS=Yes, Stock 1=40204, Supplier 1=Mouser, Termination=SMD/SMT, Voltage Rating (DC)=2kV
C8: library part GRM155R60J102KA01D, "0402 1 nF 6.3 V ±10% Tolerance X5R SMT Multilayer Ceramic Capacitor", Case Code (Imperial)=0402, Case Code (Metric)=1005, Dielectric=X5R, Manufacturer=Murata, Max Operating Temperature=85°C, Min Operating Temperature=-55°C, Package Quantity=10000, Supplier Part Number 1=490-6285-1-ND, Tolerance=10%, Voltage=6.3V, Capacitance=1nF, Case/Package=0402, Category="Ceramic Capacitors", ComponentLink1Description=https://datasheet.ciiva.com/6263/product-6263681.pdf?src-supplier=Digi-Key, ComponentLink1URL=https://datasheet.ciiva.com/6263/product-6263681.pdf?src-supplier=Digi-Key, ComponentLink2Description=https://datasheet.ciiva.com/6263/partnumbering-e-01-6263685.pdf?src-supplier=Digi-Key, ComponentLink2URL=https://datasheet.ciiva.com/6263/partnumbering-e-01-6263685.pdf?src-supplier=Digi-Key, ComponentLink3Description=https://datasheet.ciiva.com/6263/partnumbering-e-01-6263677.pdf?src-supplier=Digi-Key, ComponentLink3URL=https://datasheet.ciiva.com/6263/partnumbering-e-01-6263677.pdf?src-supplier=Digi-Key, Depth=0.5mm, Height=0.5mm, Lead Free="Lead Free", Length=1mm, Manufacturer Part Number=GRM155R60J102KA01D, Mount="Surface Mount", Packaging="Tape and Reel", Pricing 1="1=0.10000, 10=0.02800, 50=0.01520, 100=0.01240, 500=0.00886, 1000=0.00696, 2500=0.00632, 5000=0.00582 (USD)", Radiation Hardening=No, RoHS=Yes, Stock 1=20431, Supplier 1=Digi-Key, Termination=SMD/SMT, Thickness=0.022inch, Voltage Rating=6.3V, Voltage Rating (DC)=6.3V, Width=0.02inch
C10 C11 C15 C17 C18 C19 C20 C21 C22 C23 C25 C26: library part ZRB18AR61A226ME01L, "0603 22 uF 10 V ±20% Tolerance X5R Surface Mount Multilayer Ceramic Capacitor", Case/Package=0603, Manufacturer=Murata, Max Operating Temperature=85°C, Min Operating Temperature=-55°C, Supplier Part Number 1=81-ZRB18AR61A226ME1L, Tolerance=20%, Voltage Rating=10V, Capacitance=22uF, Category="Ceramic Capacitors", ComponentLink1Description=http://search.murata.co.jp/Ceramy/image/img/A01X/G101/ENG/ZRB18AR61A226ME01-02.pdf?src-supplier=Digi-Key, ComponentLink1URL=http://search.murata.co.jp/Ceramy/image/img/A01X/G101/ENG/ZRB18AR61A226ME01-02.pdf?src-supplier=Digi-Key, Manufacturer Part Number=ZRB18AR61A226ME01L, Mount="Surface Mount", Packaging="Tape and Reel", Pricing 1="1=0.44000, 10=0.30400, 100=0.18300, 500=0.13700, 1000=0.11600, 3000=0.09500 (USD)", RoHS=No, Stock 1=179696, Supplier 1=Mouser
C13 C28 C32 C33: library part C2012X5R1C106K085AC, "TDK - C2012X5R1C106K085AC - SMD Multilayer Ceramic Capacitor, 10 µF, 16 V, 0805 [2012 Metric], ± 10%, X5R, C Series TDK", Capacitance=10uF, Case Code (Imperial)=0805, Case Code (Metric)=2012, Dielectric=X5R, Dielectric Material=Ceramic, Manufacturer=TDK, Max Operating Temperature=85°C, Min Operating Temperature=-55°C, Package Quantity=1, Supplier Part Number 1=445-7644-1-ND, Tolerance=10%, Voltage Rating=16V, Case/Package=0805, Category="Ceramic Capacitors", ComponentLink1Description=https://datasheet.ciiva.com/24218/c2012x5r1c106k085ac-264980-24218056.pdf?src-supplier=Mouser, ComponentLink1URL=https://datasheet.ciiva.com/24218/c2012x5r1c106k085ac-264980-24218056.pdf?src-supplier=Mouser, ComponentLink2Description=https://datasheet.ciiva.com/28451/1796654-28451610.pdf?src-supplier=Element14, ComponentLink2URL=https://datasheet.ciiva.com/28451/1796654-28451610.pdf?src-supplier=Element14, ComponentLink3Description=https://datasheet.ciiva.com/28602/1744655-28602170.pdf?src-supplier=Element14, ComponentLink3URL=https://datasheet.ciiva.com/28602/1744655-28602170.pdf?src-supplier=Element14, ComponentLink4Description=https://datasheet.ciiva.com/6259/tdkmlcccaprange-6259116.pdf?src-supplier=Digi-Key, ComponentLink4URL=https://datasheet.ciiva.com/6259/tdkmlcccaprange-6259116.pdf?src-supplier=Digi-Key, ComponentLink5Description=https://datasheet.ciiva.com/23803/1796654-23803020.pdf?src-supplier=Newark, ComponentLink5URL=https://datasheet.ciiva.com/23803/1796654-23803020.pdf?src-supplier=Newark, ComponentLink6Description=https://datasheet.ciiva.com/22719/1796654-22719549.pdf?src-supplier=Element14, ComponentLink6URL=https://datasheet.ciiva.com/22719/1796654-22719549.pdf?src-supplier=Element14, ComponentLink7Description=https://datasheet.ciiva.com/6259/tdkmlcccaprange-6259119.pdf?src-supplier=Digi-Key, ComponentLink7URL=https://datasheet.ciiva.com/6259/tdkmlcccaprange-6259119.pdf?src-supplier=Digi-Key, ComponentLink8Description=https://datasheet.ciiva.com/28673/mlcc-commercial-general-en-28673535.pdf?src-supplier=Element14, ComponentLink8URL=https://datasheet.ciiva.com/28673/mlcc-commercial-general-en-28673535.pdf?src-supplier=Element14, Composition=Ceramic, Depth=1.25mm, Height=0.85mm, Lead Free="Lead Free", Length=2mm, Manufacturer Part Number=C2012X5R1C106K085AC, Mount="Surface Mount", Number of Pins=2, Packaging="Tape and Reel", Pricing 1="1=0.25000, 10=0.17500, 100=0.09890, 500=0.06982, 1000=0.06110 (USD)", REACH SVHC="No SVHC", RoHS=Yes, Stock 1=1442350, Supplier 1=Digi-Key, Termination=SMD/SMT, Thickness=0.037inch, Voltage Rating (DC)=16V, Weight=0.000194oz, Width=0.049inch
C16 C24: library part CL10A475KP8NNNC, "Cap Ceramic 4.7uF 10V X5R 10% Pad SMD 0603 85C T/R", Case Code (Imperial)=0603, Case Code (Metric)=1608, Dielectric=X5R, Manufacturer=Samsung, Max Operating Temperature=85°C, Min Operating Temperature=-55°C, Package Quantity=1, Supplier Part Number 1=1276-1044-1-ND, Tolerance=10%, Voltage Rating=10V, Capacitance=4.7uF, Case/Package=0603, Category="Ceramic Capacitors", ComponentLink1Description=https://datasheet.ciiva.com/25797/cl10a475kp8nnnc-25797520.pdf?src-supplier=Digi-Key, ComponentLink1URL=https://datasheet.ciiva.com/25797/cl10a475kp8nnnc-25797520.pdf?src-supplier=Digi-Key, ComponentLink2Description=https://datasheet.ciiva.com/26838/getdatasheetpartid-358676-26838384.pdf?src-supplier=Verical, ComponentLink2URL=https://datasheet.ciiva.com/26838/getdatasheetpartid-358676-26838384.pdf?src-supplier=Verical, ComponentLink3Description=https://datasheet.ciiva.com/16318/cl05b104kq5nnnc-16318245.pdf?src-supplier=Future+Electronics, ComponentLink3URL=https://datasheet.ciiva.com/16318/cl05b104kq5nnnc-16318245.pdf?src-supplier=Future+Electronics, Contact Plating=Tin, Depth=0.8mm, Height=0.8mm, Length=1.6mm, Manufacturer Part Number=CL10A475KP8NNNC, Mount="Surface Mount", Packaging="Tape and Reel", Pricing 1="1=0.10000, 10=0.04800, 50=0.02620, 100=0.02140, 500=0.01528, 1000=0.01201 (USD)", Radiation Hardening=No, RoHS=Yes, Stock 1=274416, Supplier 1=Digi-Key, Thickness=0.035inch, Width=0.031inch
C30: library part CL10A105KO8NNNC, "SAMSUNG ELECTRO-MECHANICS - CL10A105KO8NNNC - CAP, 1UF, 16V, MLCC, 0603", Case Code (Imperial)=0603, Case Code (Metric)=1608, Dielectric=X5R, Manufacturer=Samsung, Max Operating Temperature=85°C, Min Operating Temperature=-55°C, Package Quantity=1, Supplier Part Number 1=1276-1034-1-ND, Tolerance=10%, Voltage=16V, Capacitance=1uF, Case/Package=0603, Category="Ceramic Capacitors", ComponentLink1Description=https://datasheet.ciiva.com/16199/cl10a105ko8nnnc-16199033.pdf?src-supplier=Future+Electronics, ComponentLink1URL=https://datasheet.ciiva.com/16199/cl10a105ko8nnnc-16199033.pdf?src-supplier=Future+Electronics, ComponentLink2Description=https://datasheet.ciiva.com/15195/getdatasheetpartid-359688-15195706.pdf?src-supplier=Verical, ComponentLink2URL=https://datasheet.ciiva.com/15195/getdatasheetpartid-359688-15195706.pdf?src-supplier=Verical, ComponentLink3Description=https://datasheet.ciiva.com/29198/458190-da-01-en-vs-kondensator-0603-29198480.pdf?src-supplier=Conrad, ComponentLink3URL=https://datasheet.ciiva.com/29198/458190-da-01-en-vs-kondensator-0603-29198480.pdf?src-supplier=Conrad, Contact Plating=Tin, Depth=0.8mm, Height=0.8mm, Lead Free="Lead Free", Length=1.6mm, Manufacturer Part Number=CL10A105KO8NNNC, Material=Ceramic, Mount="Surface Mount", Packaging="Tape and Reel", Pricing 1="1=0.10000, 10=0.03500, 50=0.01920, 100=0.01570, 500=0.01124, 1000=0.00883 (USD)", Radiation Hardening=No, RoHS=Yes, Stock 1=1739627, Supplier 1=Digi-Key, Thickness=0.035inch, Voltage Rating=16V, Voltage Rating (DC)=16V, Width=0.031inch
C34: library part CM02X5R333K06AH, "Multilayer Ceramic Capacitors MLCC - SMD/SMT 6.3V 0.033uF X5R 01005 10%", Manufacturer="Kyocera AVX", Supplier Part Number 1=1253-CM02X5R333K06AHCT-ND, Manufacturer Part Number=CM02X5R333K06AH, Pricing 1="1=0.10000, 10=0.04800, 50=0.02640, 100=0.02160, 500=0.01540, 1000=0.01210, 2500=0.01100, 5000=0.01012 (USD)", RoHS=No, Stock 1=20000, Supplier 1=Digi-Key
D1: "TVS DIODE 5.5V 14V 14USON (ESD Protection for PHY)", Breakdown Voltage=6V, Clamping Voltage=14V, Leakage Current=10nA, Manufacturer="Texas Instruments", Max Operating Temperature=125°C, Max Power Dissipation=40W, Min Operating Temperature=-40°C, Package Quantity=3000, Peak Pulse Current=2.5A, Power Line Protection=Yes, Reverse Standoff Voltage=5.5V, Supplier Part Number 1=296-39349-1-ND, Category="ESD and Circuit Protection ICs", ComponentLink1Description=https://datasheet.ciiva.com/29883/tpd6e05u06-29883847.pdf?src-supplier=Avnet, ComponentLink1URL=https://datasheet.ciiva.com/29883/tpd6e05u06-29883847.pdf?src-supplier=Avnet, ComponentLink2Description=https://datasheet.ciiva.com/26918/getdatasheetpartid-747210-26918045.pdf?src-supplier=Verical, ComponentLink2URL=https://datasheet.ciiva.com/26918/getdatasheetpartid-747210-26918045.pdf?src-supplier=Verical, Depth=1.45mm, Direction=Unidirectional, Interface=LVDS,USB,Ethernet,HDMI,PCIe,SATA, Lead Free="Lead Free", Length=3.6mm, Manufacturer Part Number=TPD6E05U06RVZR, Min Breakdown Voltage=6V, Mount="Surface Mount", Number of Bidirectional Channels=6, Number of Channels=6, Number of Pins=14, Packaging="Tape and Reel", Peak Pulse Power=40W, Polarity=Bidirectional, Pricing 1="1=0.80000, 10=0.66000, 100=0.47930, 500=0.38340, 1000=0.30885 (USD)", Radiation Hardening=No, RoHS=Yes, Stock 1=12287, Supplier 1=Digi-Key, Termination=SMD/SMT, Working Voltage=5.5V
D2: library part LGL29K-G2J1-24-Z, "LED Uni-Color Green 572nm 2-Pin Chip 0603(1608Metric) T/R", Case Code (Imperial)=0603, Case Code (Metric)=1608, Forward Current=20mA, Forward Voltage=2.2V, Lens Color=White, Manufacturer="Osram Opto", Max Operating Temperature=100°C, Min Operating Temperature=-40°C, Package Quantity=5000, Reverse Voltage=12V, Supplier Part Number 1=475-2709-1-ND, Test Current=2mA, Case/Package=0603, Category=Uncategorized, Color=Green, ComponentLink1Description=https://datasheet.ciiva.com/4689/g-l29k-39844-4689584.pdf?src-supplier=Mouser, ComponentLink1URL=https://datasheet.ciiva.com/4689/g-l29k-39844-4689584.pdf?src-supplier=Mouser, ComponentLink2Description=https://datasheet.ciiva.com/15198/getdatasheetpartid-571127-15198411.pdf?src-supplier=Verical, ComponentLink2URL=https://datasheet.ciiva.com/15198/getdatasheetpartid-571127-15198411.pdf?src-supplier=Verical, ComponentLink3Description=https://datasheet.ciiva.com/2112/00077107-0-2112886.pdf?src-supplier=Digi-Key, ComponentLink3URL=https://datasheet.ciiva.com/2112/00077107-0-2112886.pdf?src-supplier=Digi-Key, ComponentLink4Description=https://datasheet.ciiva.com/2112/00077107-0-2112887.pdf?src-supplier=Digi-Key, ComponentLink4URL=https://datasheet.ciiva.com/2112/00077107-0-2112887.pdf?src-supplier=Digi-Key, ComponentLink5Description=https://datasheet.ciiva.com/2112/00077107-0-2112888.pdf?src-supplier=Digi-Key, ComponentLink5URL=https://datasheet.ciiva.com/2112/00077107-0-2112888.pdf?src-supplier=Digi-Key, Depth=0.8mm, Dominant Wavelength=570nm, Height=0.65mm, Illumination Color=Green, Length=1.3mm, Lens Size=0.8mm, Lens Style=Flat,Diffused,Colorless,Rectangular, Lens Transparency=Diffused, Luminous Flux=0.012lm, Luminous Intensity=5.6mcd, Manufacturer Part Number=LGL29K-G2J1-24-Z, Mount="Surface Mount", Number of Elements=1, Number of LEDs=1, Number of Pins=2, Packaging="Tape and Reel", Pricing 1="1=0.42000, 10=0.30400, 100=0.19830, 500=0.14250, 1000=0.11153, 2500=0.10224 (USD)", Radiation Hardening=No, RoHS=Yes, Stock 1=112400, Supplier 1=Digi-Key, Viewing Angle=160°, Width=0.8mm
D3: "TVS DIODE 5.5VWM SOT891", Breakdown Voltage=9V, Capacitance=1.2pF, Case/Package=DFN, Leakage Current=100nA, Manufacturer="NXP Semiconductors", Max Operating Temperature=85°C, Min Breakdown Voltage=6V, Min Operating Temperature=-40°C, Package Quantity=1, Power Line Protection=Yes, Reverse Standoff Voltage=5.5V, Supplier Part Number 1=568-6341-2-ND, Category="ESD and Circuit Protection ICs", ComponentLink1Description=https://datasheet.ciiva.com/337/ip4221cz6-xs-337188.pdf?src-supplier=Digi-Key, ComponentLink1URL=https://datasheet.ciiva.com/337/ip4221cz6-xs-337188.pdf?src-supplier=Digi-Key, ComponentLink2Description=https://datasheet.ciiva.com/337/ip4221cz6-xs-337189.pdf?src-supplier=Digi-Key, ComponentLink2URL=https://datasheet.ciiva.com/337/ip4221cz6-xs-337189.pdf?src-supplier=Digi-Key, ComponentLink3Description=https://datasheet.ciiva.com/337/ip4221cz6-xs-337190.pdf?src-supplier=Digi-Key, ComponentLink3URL=https://datasheet.ciiva.com/337/ip4221cz6-xs-337190.pdf?src-supplier=Digi-Key, Depth=1.05mm, Direction=Unidirectional, Lead Free="Lead Free", Length=1.05mm, Manufacturer Part Number=IP4221CZ6-XS132, Mount="Surface Mount", Number of Bidirectional Channels=4, Number of Channels=4, Number of Pins=6, Packaging="Tape and Reel", Radiation Hardening=No, RoHS=Yes, Supplier 1=Digi-Key, Termination=SMD/SMT
FB1 FB2 FB3: library part BLM15AG102SH1D, "FERRITE BEAD 1 KOHM 0402 1LN", Case Code (Imperial)=0402, Case Code (Metric)=1005, DC Resistance (DCR)=1R, Manufacturer=Murata, Max Current Rating=200mA, Max Operating Temperature=125°C, Min Operating Temperature=-55°C, Package Quantity=10000, Ratings=AEC-Q200, Supplier Part Number 1=490-7804-1-ND, Test Frequency=100MHz, Tolerance=25%, Case/Package=0402, Category="Ferrite Beads and Chips", ComponentLink1Description=https://datasheet.ciiva.com/29364/l0132s0193blm15a-sh-29364285.pdf?src-supplier=Digi-Key, ComponentLink1URL=https://datasheet.ciiva.com/29364/l0132s0193blm15a-sh-29364285.pdf?src-supplier=Digi-Key, ComponentLink2Description=https://datasheet.ciiva.com/17279/l0132s0193blm15a-sh-17279626.pdf?src-supplier=Avnet+Europe, ComponentLink2URL=https://datasheet.ciiva.com/17279/l0132s0193blm15a-sh-17279626.pdf?src-supplier=Avnet+Europe, ComponentLink3Description=https://datasheet.ciiva.com/8510/l0132s0193blm15a-sh-8510171.pdf?src-supplier=Avnet, ComponentLink3URL=https://datasheet.ciiva.com/8510/l0132s0193blm15a-sh-8510171.pdf?src-supplier=Avnet, ComponentLink4Description=https://datasheet.ciiva.com/29364/l0132s0193blm15a-sh-29364283.pdf?src-supplier=Digi-Key, ComponentLink4URL=https://datasheet.ciiva.com/29364/l0132s0193blm15a-sh-29364283.pdf?src-supplier=Digi-Key, ComponentLink5Description=https://datasheet.ciiva.com/29364/l0132s0193blm15a-sh-29364286.pdf?src-supplier=Digi-Key, ComponentLink5URL=https://datasheet.ciiva.com/29364/l0132s0193blm15a-sh-29364286.pdf?src-supplier=Digi-Key, Core Material=Ferrite, Depth=0.55mm, Height=0.022inch, Impedance=1kR, Length=0.039inch, Manufacturer Part Number=BLM15AG102SH1D, Max DC Current=200mA, Mount="Surface Mount", Number of Circuits=1, Number of Lines=1, Packaging="Tape and Reel", Pricing 1="1=0.11000, 10=0.09300, 25=0.08320, 50=0.06100, 100=0.05270, 250=0.04164, 500=0.03516, 1000=0.02960, 5000=0.02636 (USD)", REACH SVHC="No SVHC", RoHS=Yes, Stock 1=79326, Supplier 1=Digi-Key, Termination=SMD/SMT, Width=0.5mm
FB4 FB5: library part 742792662, "Ferrite Beads Multi-Layer Chip Bead 1KOhm 25% 100MHz 600mA 0603 T/R", Case Code (Imperial)=0603, Case Code (Metric)=1608, Case/Package=SMD/SMT, DC Resistance (DCR)=300mR, Manufacturer="Wurth Electronics", Max Current Rating=600mA, Max Operating Temperature=125°C, Min Operating Temperature=-55°C, Package Quantity=4000, Supplier Part Number 1=732-4670-1-ND, Test Frequency=120MHz, Tolerance=25%, Category="Ferrite Beads and Chips", ComponentLink1Description=https://datasheet.ciiva.com/29364/742792662-29364469.pdf?src-supplier=Digi-Key, ComponentLink1URL=https://datasheet.ciiva.com/29364/742792662-29364469.pdf?src-supplier=Digi-Key, ComponentLink2Description=https://datasheet.ciiva.com/30489/0900766b812a6756-30489145.pdf?src-supplier=RSComponents, ComponentLink2URL=https://datasheet.ciiva.com/30489/0900766b812a6756-30489145.pdf?src-supplier=RSComponents, ComponentLink3Description=https://datasheet.ciiva.com/29364/742792662-29364471.pdf?src-supplier=Digi-Key, ComponentLink3URL=https://datasheet.ciiva.com/29364/742792662-29364471.pdf?src-supplier=Digi-Key, ComponentLink4Description=https://datasheet.ciiva.com/29364/742792662-29364473.pdf?src-supplier=Digi-Key, ComponentLink4URL=https://datasheet.ciiva.com/29364/742792662-29364473.pdf?src-supplier=Digi-Key, Depth=0.8mm, Height=0.8mm, Impedance=1kR, Lead Free="Lead Free", Length=1.6mm, Manufacturer Part Number=742792662, Material=Ferrite, Max DC Current=600mA, Mount="Surface Mount", Number of Lines=1, Packaging="Tape and Reel", Pricing 1="1=0.17000, 50=0.16800, 100=0.15500, 500=0.14800, 1000=0.14100, 2000=0.13400 (USD)", RoHS=Yes, Stock 1=96964, Supplier 1=Digi-Key, Termination=SMD/SMT, Weight=7.1E-05oz, Width=0.031inch
J1: library part "Molex Micro USB", "https://www.molex.com/molex/products/part-detail/io_connectors/0475890001", Manufacturer_Part_Number=47589-0001, Built_By=EMA_Don, Copyright="Copyright (C) 2016 Accelerated Designs. All rights reserved", RefDes=RefDes, SourceLibrary=Molex_2018-12-15, Type=DEV, Vendor="Molex Connector Corporation"
L1 L2: library part ACM2012-121-2P-T002, "TDK - ACM2012-121-2P-T002 - Filter, Common Mode, ACM Series, 120 ohm, 370 mA, 2mm x 1.2mm x 1.3mm", Case/Package=0805, Current=370mA, DC Resistance (DCR)=220mR, Manufacturer=TDK, Max Operating Temperature=85°C, Min Operating Temperature=-40°C, Package Quantity=1, Supplier Part Number 1=445-2208-1-ND, Test Frequency=100MHz, Voltage Rating=50V, Category="Common Mode Chokes", ComponentLink1Description=https://datasheet.ciiva.com/26793/acm2012-121-2p-t002-26793322.pdf?src-supplier=IIIC, ComponentLink1URL=https://datasheet.ciiva.com/26793/acm2012-121-2p-t002-26793322.pdf?src-supplier=IIIC, ComponentLink2Description=https://datasheet.ciiva.com/1007/e9712-acm-1007629.pdf?src-supplier=Digi-Key, ComponentLink2URL=https://datasheet.ciiva.com/1007/e9712-acm-1007629.pdf?src-supplier=Digi-Key, ComponentLink3Description=https://datasheet.ciiva.com/1007/e9712-acm-1007630.pdf?src-supplier=Digi-Key, ComponentLink3URL=https://datasheet.ciiva.com/1007/e9712-acm-1007630.pdf?src-supplier=Digi-Key, ComponentLink4Description=https://datasheet.ciiva.com/1007/e9712-acm-1007631.pdf?src-supplier=Digi-Key, ComponentLink4URL=https://datasheet.ciiva.com/1007/e9712-acm-1007631.pdf?src-supplier=Digi-Key, ComponentLink5Description=https://datasheet.ciiva.com/16416/e9719-acm2012-16416519.pdf?src-supplier=Future+Electronics, ComponentLink5URL=https://datasheet.ciiva.com/16416/e9719-acm2012-16416519.pdf?src-supplier=Future+Electronics, ComponentLink6Description=https://datasheet.ciiva.com/46450/1750020-46450935.pdf?src-supplier=Element14, ComponentLink6URL=https://datasheet.ciiva.com/46450/1750020-46450935.pdf?src-supplier=Element14, Current Rating=370mA, Depth=1.2mm, Height=1.3mm, Impedance=120R, Lead Free="Lead Free", Length=2mm, Manufacturer Part Number=ACM2012-121-2P-T002, Max DC Current=370mA, Mount="Surface Mount", Number of Lines=2, Packaging="Tape and Reel", Pricing 1="1=0.45000, 10=0.39200, 25=0.36400, 50=0.30800, 100=0.28000, 250=0.26320, 500=0.23520, 1000=0.19040 (USD)", REACH SVHC="No SVHC", RoHS=Yes, Shielding=Shielded, Stock 1=21794, Supplier 1=Digi-Key, Termination=SMD/SMT, Voltage Rating (DC)=50V, Width=1.2mm
L3: library part LQM21PN4R7MGRB, "Inductor with Inductance: 4.7uH Tol. +/-20%, Package: 0805 (2012)", Package="2012 Murata", Availability=Bad, Check_prices=https://www.snapeda.com/parts/LQM21PN4R7MGRB/Murata/view-part/4470527/?ref=eda, MF=Murata, MP=LQM21PN4R7MGRB, Price=None, SnapEDA_Link=https://www.snapeda.com/parts/LQM21PN4R7MGRB/Murata/view-part/4470527/?ref=snap
LED1 LED2: "PICOLED-RGB LED, 5 mA, -40 to 85 degC, 4-Pin 1 x 1 x 0.25 mm SMD, RoHS, Tape and Reel", Manufacturer="ROHM Semiconductor", Temperature Range="-40 to 85 degC", ComponentLink1Description="Manufacturer URL", ComponentLink1URL=http://www.rohm.com/, ComponentLink2Description=Datasheet, ComponentLink2URL=http://rohmfs.rohm.com/en/products/databook/datasheet/opto/led/chip_multi/smlp34.pdf, DatasheetVersion="Rev. G", IF(RGB)="5 mA", IR(RGB)="10 uA Max.", Mounting Technology="Surface Mount", PackageDescription="4-Pin SMD, Body 1 x 1 mm, Pitch 0.85 mm", PackageReference=SMLP34, Packing="Tape and Reel", PartNumber=SMLP34RGB2W3, RoHS=TRUE, VF(Blue)="3.2 V Typ.", VF(Green)="3.3 V Typ.", VF(Red)="2.2 V Typ.", VR(RGB)="5 V"
P1: library part 1-406541-5, "Conn RJ-45 F 8 POS 2.04mm Solder RA Thru-Hole 8 Terminal 1 Port Tray Cat 5", Flammability Rating="UL94 V-0", Housing Color=Black, Manufacturer="TE Connectivity", Max Operating Temperature=80°C, Max Voltage Rating (AC)=150V, Min Operating Temperature=-40°C, Package Quantity=441, Supplier Part Number 1=A102038-ND, Category="Modular / Ethernet Connectors", ComponentLink1Description=https://datasheet.ciiva.com/30494/0900766b8121d3cc-30494417.pdf?src-supplier=RSComponents, ComponentLink1URL=https://datasheet.ciiva.com/30494/0900766b8121d3cc-30494417.pdf?src-supplier=RSComponents, ComponentLink2Description=https://datasheet.ciiva.com/1107/1652951-1107156.pdf?src-supplier=Element14, ComponentLink2URL=https://datasheet.ciiva.com/1107/1652951-1107156.pdf?src-supplier=Element14, ComponentLink3Description=https://datasheet.ciiva.com/16324/eng-cd-406541-m8-16324678.pdf?src-supplier=Future+Electronics, ComponentLink3URL=https://datasheet.ciiva.com/16324/eng-cd-406541-m8-16324678.pdf?src-supplier=Future+Electronics, ComponentLink4Description=https://datasheet.ciiva.com/23759/1509418-23759355.pdf?src-supplier=Newark, ComponentLink4URL=https://datasheet.ciiva.com/23759/1509418-23759355.pdf?src-supplier=Newark, ComponentLink5Description=https://datasheet.ciiva.com/16548/eng-cd-406541-j-16548134.pdf?src-supplier=Avnet+Europe, ComponentLink5URL=https://datasheet.ciiva.com/16548/eng-cd-406541-j-16548134.pdf?src-supplier=Avnet+Europe, ComponentLink6Description=https://datasheet.ciiva.com/26824/getdatasheetpartid-242299-26824299.pdf?src-supplier=Verical, ComponentLink6URL=https://datasheet.ciiva.com/26824/getdatasheetpartid-242299-26824299.pdf?src-supplier=Verical, Connector Type=Jack, Contact Material=Bronze, Contact Plating=Gold, Depth=15.75mm, Direction=Up, Element Configuration=Single, Gender=Female, Housing Material=Thermoplastic, Keyed=No, Length=17.27mm, Manufacturer Part Number=1-406541-5, Mount=Panel, Number of Contacts=8, Number of Ports=1, Number of Positions=8, Number of Positions Loaded=8, Number of Rows=1, Orientation="Right Angle", Packaging=Tray, PCB Mounting Orientation="Right Angle", PCB Thickness=1.57mm, Pitch=2.04mm, Pricing 1="1=2.85000, 10=2.73200, 25=2.50440, 50=2.39040, 100=2.27660, 250=1.99208, 500=1.93514, 1000=1.65056, 2500=1.53673 (USD)", Radiation Hardening=No, REACH SVHC=Unknown, RoHS=Yes, Shielding=Shielded, Stock 1=2926, Supplier 1=Digi-Key, Tail Length=2.54mm, Termination=Solder
P2: "HE2P-20G6C394-5R, 2.54 mm pegs.", Package=None, Availability=Unavailable, Centerline_Pitch="2.54 mm[.1 in]", EU_RoHS_Compliance=Compliant, MF="TE Connectivity", MP=1-826944-0, Number_of_Positions=20, Price=None, Product_Type=Connector, SnapEDA_Link=https://www.snapeda.com/parts/1-826944-0/TE%20Connectivity%20AMP%20Connectors/view-part/517829/?ref=snap, TE_purchase_URL=https://www.te.com/usa-en/product-1-826944-0.html?te_bu=Cor&te_type=disp&te_campaign=seda_glo_cor-seda-global-disp-prtnr-fy19-seda-model-bom-cta_sma-317_1&elqCampaignId=32493
R1: library part CRCW040249R9FKTD, "RES SMD 49.9 OHM 1% 1/16W 0402", Case Code (Imperial)=0402, Case Code (Metric)=1005, Manufacturer=Vishay, Max Operating Temperature=155°C, Max Power Dissipation=63mW, Min Operating Temperature=-55°C, Package Quantity=10000, Resistor Type="Thick Film", Supplier Part Number 1=541-2963-1-ND, Temperature Coefficient=100ppm/°C, Tolerance=1%, Voltage Rating=50V, Case/Package=0402, Category="Chip SMD Resistors", ComponentLink1Description=https://datasheet.ciiva.com/2563/dcrcw-2563534.pdf?src-supplier=Digi-Key, ComponentLink1URL=https://datasheet.ciiva.com/2563/dcrcw-2563534.pdf?src-supplier=Digi-Key, Contact Plating=Tin,Lead, Depth=0.5mm, Features="Automotive AEC-Q200", Height=0.016inch, Lead Free="Contains Lead", Length=1mm, Manufacturer Part Number=CRCW040249R9FKTD, Military Standard=Not, Number of Terminations=2, Packaging="Tape and Reel", Power Rating=63mW, Pricing 1="1=0.12000, 10=0.10900, 100=0.04200, 1000=0.01848, 2500=0.01596, 5000=0.01428 (USD)", Radiation Hardening=No, REACH SVHC=Unknown, Resistance=49.9R, RoHS=Yes, Stock 1=2971, Supplier 1=Digi-Key, Voltage Rating (DC)=50V, Weight=2.3E-05oz, Width=0.02inch
R2 R3 R9: library part CRCW02011K00FNED, "Res Thick Film 0201 1K Ohm 1% 1/20W 200ppm/C Molded SMD SMD Paper T/R", Case Code (Imperial)=0201, Case Code (Metric)=0603, Manufacturer=Vishay, Max Operating Temperature=155°C, Max Power Dissipation=50mW, Min Operating Temperature=-55°C, Package Quantity=1, Resistance=1kR, Resistor Type="Thick Film", Supplier Part Number 1=541-1.00KABCT-ND, Temperature Coefficient=200ppm/°C, Tolerance=1%, Voltage Rating=30V, Case/Package=0201, Category="Chip SMD Resistors", ComponentLink1Description=https://datasheet.ciiva.com/2474/crcw0201e3-2474800.pdf?src-supplier=Digi-Key, ComponentLink1URL=https://datasheet.ciiva.com/2474/crcw0201e3-2474800.pdf?src-supplier=Digi-Key, ComponentLink2Description=https://datasheet.ciiva.com/2474/crcw0201e3-2474802.pdf?src-supplier=Digi-Key, ComponentLink2URL=https://datasheet.ciiva.com/2474/crcw0201e3-2474802.pdf?src-supplier=Digi-Key, ComponentLink3Description=https://datasheet.ciiva.com/22665/1825492-22665818.pdf?src-supplier=Element14, ComponentLink3URL=https://datasheet.ciiva.com/22665/1825492-22665818.pdf?src-supplier=Element14, ComponentLink4Description=https://datasheet.ciiva.com/7983/1719906-7983323.pdf?src-supplier=Element14, ComponentLink4URL=https://datasheet.ciiva.com/7983/1719906-7983323.pdf?src-supplier=Element14, ComponentLink5Description=https://datasheet.ciiva.com/7983/1719906-7983324.pdf?src-supplier=Element14, ComponentLink5URL=https://datasheet.ciiva.com/7983/1719906-7983324.pdf?src-supplier=Element14, ComponentLink6Description=https://datasheet.ciiva.com/2474/crcw0201e3-2474801.pdf?src-supplier=Digi-Key, ComponentLink6URL=https://datasheet.ciiva.com/2474/crcw0201e3-2474801.pdf?src-supplier=Digi-Key, ComponentLink7Description=https://datasheet.ciiva.com/3255/crcw0201e3-3255929.pdf?src-supplier=Avnet, ComponentLink7URL=https://datasheet.ciiva.com/3255/crcw0201e3-3255929.pdf?src-supplier=Avnet, ComponentLink8Description=https://datasheet.ciiva.com/22871/70202042-22871422.pdf?src-supplier=Allied+Electronics, ComponentLink8URL=https://datasheet.ciiva.com/22871/70202042-22871422.pdf?src-supplier=Allied+Electronics, ComponentLink9Description=https://datasheet.ciiva.com/22692/1719906-22692751.pdf?src-supplier=Element14, ComponentLink9URL=https://datasheet.ciiva.com/22692/1719906-22692751.pdf?src-supplier=Element14, Contact Plating=Tin, Depth=0.3mm, Height=0.011inch, Lead Free="Lead Free", Length=0.6mm, Manufacturer Part Number=CRCW02011K00FNED, Military Standard=Not, Mount="Surface Mount", Number of Pins=2, Number of Terminations=2, Packaging="Tape and Reel", Power Rating=50mW, Pricing 1="1=0.10000, 10=0.05700, 100=0.02300, 1000=0.01034, 2500=0.00897, 5000=0.00741 (USD)", Radiation Hardening=No, REACH SVHC=Unknown, RoHS=Yes, Stock 1=279214, Supplier 1=Digi-Key, Termination=SMD/SMT, Voltage Rating (DC)=30V, Weight=6E-06oz, Width=0.012inch
R4: library part CRCW02016K49FNED, "RES SMD 6.49K OHM 1% 1/20W 0201", Case Code (Imperial)=0201, Case Code (Metric)=0603, Manufacturer=Vishay, Max Operating Temperature=155°C, Min Operating Temperature=-55°C, Power Rating=50mW, Resistance=6.49kR, Resistor Type="Thick Film", Supplier Part Number 1=541-CRCW02016K49FNEDCT-ND, Temperature Coefficient=200ppm/°C, Tolerance=1%, Voltage Rating=30V, Case/Package=0201, Category="Chip SMD Resistors", ComponentLink1Description=https://datasheet.ciiva.com/22684/1700795-22684054.pdf?src-supplier=Element14, ComponentLink1URL=https://datasheet.ciiva.com/22684/1700795-22684054.pdf?src-supplier=Element14, ComponentLink2Description=https://datasheet.ciiva.com/9062/crcw0201e3-9062251.pdf?src-supplier=Avnet, ComponentLink2URL=https://datasheet.ciiva.com/9062/crcw0201e3-9062251.pdf?src-supplier=Avnet, Contact Plating=Tin, Height=230um, Lead Free="Lead Free", Length=600um, Manufacturer Part Number=CRCW02016K49FNED, Packaging="Cut Tape", Pricing 1="1=0.10000, 10=0.05700, 100=0.02300, 1000=0.01034, 2500=0.00897, 5000=0.00741 (USD)", REACH SVHC=Unknown, RoHS=Yes, Stock 1=4970, Supplier 1=Digi-Key, Voltage Rating (DC)=30V, Width=300um